# EAGLE board Current Sense (EAGLE 6.2)
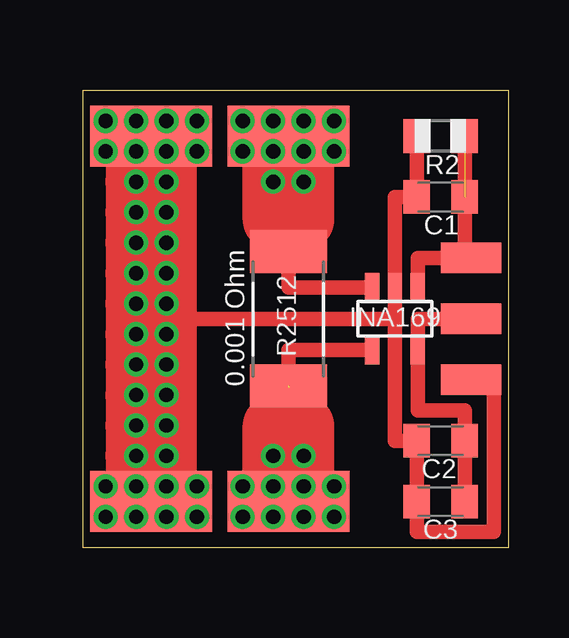
[diagram p0: board, top side]
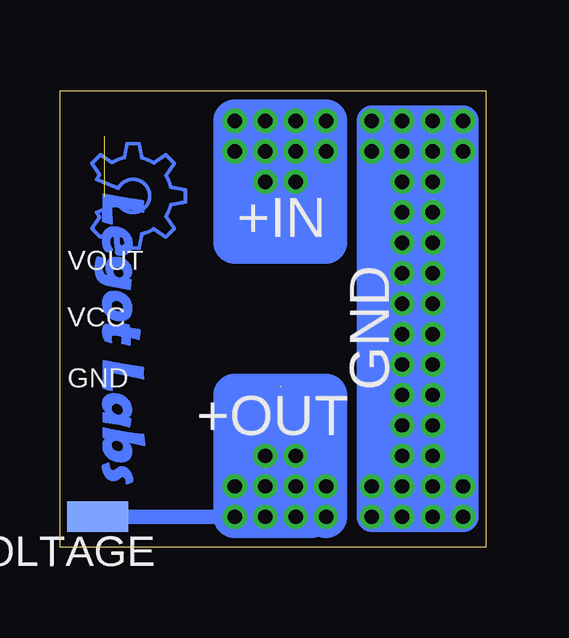
[diagram p1: board, bottom side, seen from below]

Size 17.77 x 19.04 mm. Coordinates in mm from the lower left corner, seen from the top.
Outline: 0,0 17.77,0 17.77,19.04 0,19.04 0,0
Copper layers (1*16): Top 0.035mm / dielectric 1.5mm / Bottom 0.035mm
Design rules: minimum track width 10mil, minimum drill 24mil, track to track 8mil, track to pad 8mil, pad to pad 8mil, via to via 8mil, smd to smd 8mil, copper to edge 40mil, drill to drill 8mil, minimum pad ring 10mil, minimum via ring 8mil, stop-mask expansion 4mil, vias tented up to drill 0mil, thermal gap 10mil

## Footprints (pad centres in the part's own frame; a part is rotated, then mirrored left to right if it is on the bottom)
C0805K = smd 1.1 x 1.4: 1 -1,0; 2 1,0
SMD1,27-2,54 = smd 1.27 x 2.54: 1 0,0
SOT23-5 = smd 0.6 x 1.2: 1 -0.95,-1.306; 2 0,-1.306; 3 0.95,-1.306; 4 0.95,1.306; 5 -0.95,1.306
SMD2,54-5,08 = smd 2.54 x 5.08: 1 0,0
R2512 = smd 1.8 x 3.2: 1 -2.8,0; 2 2.8,0
R0805 = smd 1.1 x 1.4: 1 -1,0; 2 1,0

## Placement (x,y rotation side)
C1  .1uf  [C0805K]  14.92,14.61 180 top
C2  [C0805K]  14.92,4.45 180 top
C3  [C0805K]  14.92,1.91 180 top
GND  [SMD1,27-2,54]  16.19,6.99 90 top
IC1  INA169  [SOT23-5]  13.02,9.53 180 top
PAD1  [SMD2,54-5,08]  8.57,1.91 90 top
PAD3  [SMD2,54-5,08]  8.57,17.14 90 top
PAD6  [SMD2,54-5,08]  2.86,1.91 90 top
PAD8  [SMD2,54-5,08]  2.86,17.14 270 top
R1  0.001  [R2512]  8.57,9.53 270 top
R2  100k  [R0805]  14.92,17.14 0 top
VCC  [SMD1,27-2,54]  16.19,9.53 90 top
VOLTAGE  [SMD1,27-2,54]  16.19,1.27 90 bottom
VOUT  [SMD1,27-2,54]  16.19,12.06 90 top

## Library data of the parts
C1-C3 R1 R2 = adafruit
GND PAD1 PAD3 PAD6 PAD8 VCC VOLTAGE VOUT = wirepad
IC1 = burr-brown; MF: TEXAS INSTRUMENTS; MPN: INA138NA/250; OC_FARNELL: 1564888; OC_NEWARK: 80K5906

## Nets
N$2: IC1.3 PAD3.1 R1.1
N$4: C1.2 C2.2 C3.2 GND.1 IC1.2 PAD6.1 PAD8.1 R2.1
N$5: C1.1 IC1.1 R2.2 VOUT.1
N$6: C2.1 C3.1 IC1.5 VCC.1
OUT: IC1.4 PAD1.1 R1.2 VOLTAGE.1

## Tracks (layer width: path | path; a pad name or v marks a point on that pad's centre or on a via)
N$1
  Top 1.27: 9.84,14.61 9.53,14.61
N$2  (via drill 0.6)
  Top 0.61: IC1.3 8.57,10.83 R1.1 PAD3.1
  Top 2.54: 7.94,13.66 v7.94,15.24 v7.94,16.51 7.94,17.14 PAD3.1 | PAD3.1 9.21,17.14 v9.21,16.51 v9.21,15.24 | v9.21,15.24 9.21,14.61 8.57,14.61 | 8.57,14.61 8.57,13.97 | 8.57,14.61 PAD3.1 | v9.21,15.24 9.21,13.65 7.94,13.65
  Bottom 1.778: v10.48,16.51 10.48,12.7 6.67,12.7 v6.67,16.51 v6.67,17.78 v7.94,17.78 v9.21,17.78 v10.48,17.78 v10.48,16.51 | v10.48,16.51 v9.21,16.51 v7.94,16.51 v7.94,15.24 7.94,13.97 9.21,13.97 v9.21,15.24
N$4  (via drill 0.6)
  Top 0.61: R2.1 C1.2 13.02,14.61 IC1.2 13.02,9.53 | GND.1 17.14,6.99 17.14,0.64 13.92,0.64 C3.2 C2.2 13.02,4.45 13.02,9.53 | PAD8.1 2.86,9.53 13.02,9.53
  Top 2.54: 3.49,1.91 PAD6.1 2.22,1.91 v2.22,2.54 v2.22,3.81 v2.22,5.08 v2.22,6.35 v2.22,7.62 v2.22,8.89 v2.22,10.16 v2.22,11.43 v2.22,12.7 v2.22,13.97 v2.22,15.24 v2.22,16.51 2.22,17.14 PAD8.1 3.49,17.14 v3.49,16.51 v3.49,15.24 v3.49,13.97 v3.49,12.7 v3.49,11.43 v3.49,10.16 v3.49,8.89 v3.49,7.62 v3.49,6.35 v3.49,5.08 v3.49,3.81 v3.49,2.54 3.49,1.91
  Bottom 1.27: v0.95,16.51 v0.95,2.54 v0.95,1.27 v2.22,1.27 v3.49,1.27 v4.76,1.27 v4.76,2.54 v4.76,16.51 v4.76,17.78 v3.49,17.78 v2.22,17.78 v0.95,17.78 v0.95,16.51 | v0.95,16.51 v2.22,16.51 2.86,16.51
  Bottom 3.81: 2.86,16.51 2.86,2.54
N$5  (1 unrouted)
  Top 0.61: R2.2 15.92,12.06 VOUT.1 13.97,12.06 IC1.1
N$6
  Top 0.61: C3.1 C2.1 15.92,5.71 13.97,5.71 IC1.5 13.97,9.53 VCC.1
OUT  (via drill 0.6)  (1 unrouted)
  Top 0.61: IC1.4 8.57,8.22 R1.2
  Top 0.813: 8.57,6.67 8.57,1.27 v6.67,1.27
  Top 2.54: PAD1.1 7.94,1.91 v7.94,2.54 v7.94,3.81 7.94,5.08 9.21,5.08 v9.21,3.81 v9.21,2.54 8.57,2.54
  Bottom 0.61: VOLTAGE.1 v10.48,1.27
  Bottom 1.778: v6.67,1.27 v6.67,2.54 6.67,6.35 10.48,6.35 v10.48,2.54 v10.48,1.27 v9.21,1.27 v7.94,1.27 7.3,1.27 7.3,5.08 9.21,5.08 v9.21,3.81 v9.21,2.54 v7.94,2.54 v7.94,3.81 8.57,3.81
(copper drawn outside any net)
  shapes: Bottom area x3731

## Text on the board
tNames: INA169 | R2512 | 0.001 Ohm
bNames: +IN | GND | VOUT | VCC | GND | +OUT